# EAGLE board Uno (EAGLE 6.1)
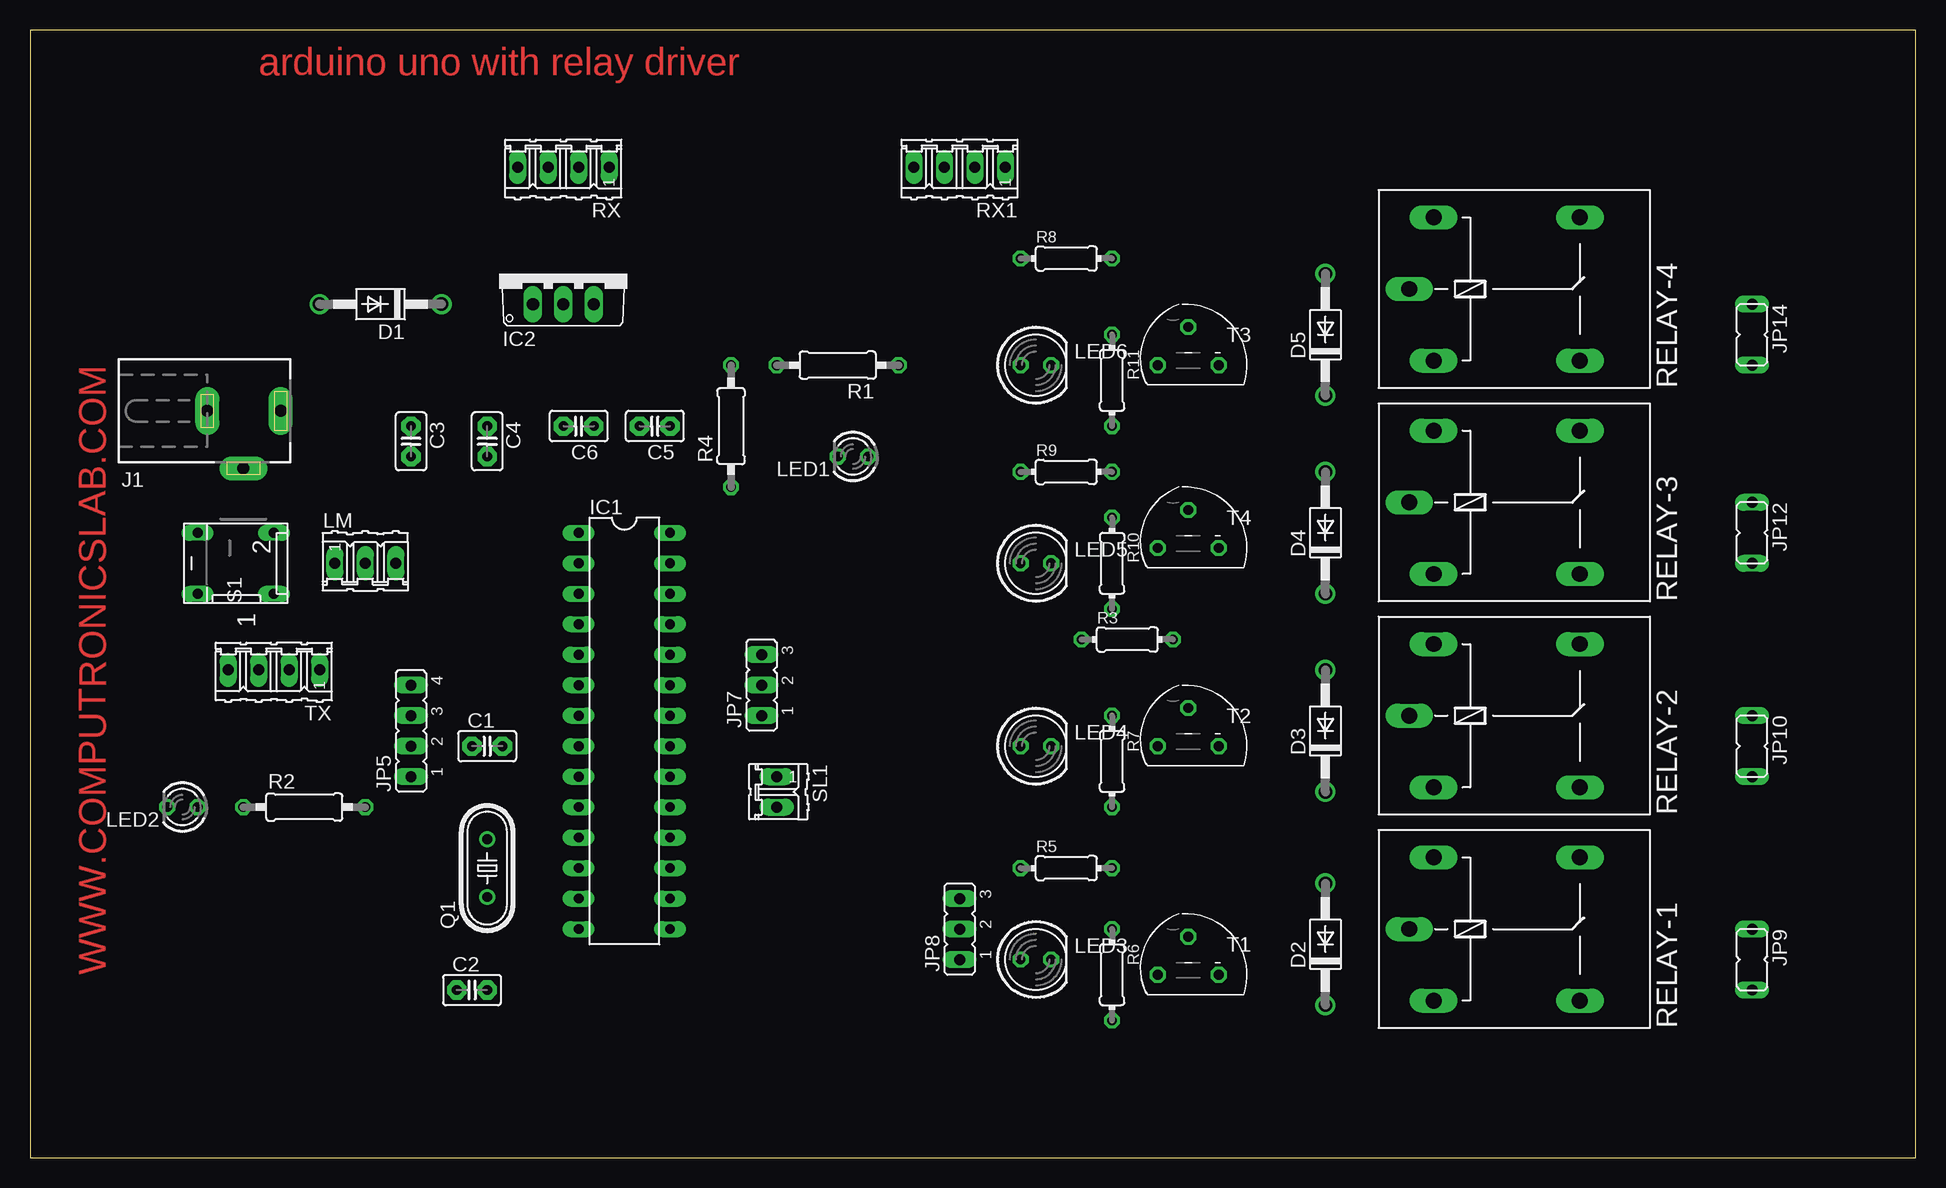
[diagram p0: board, top side]
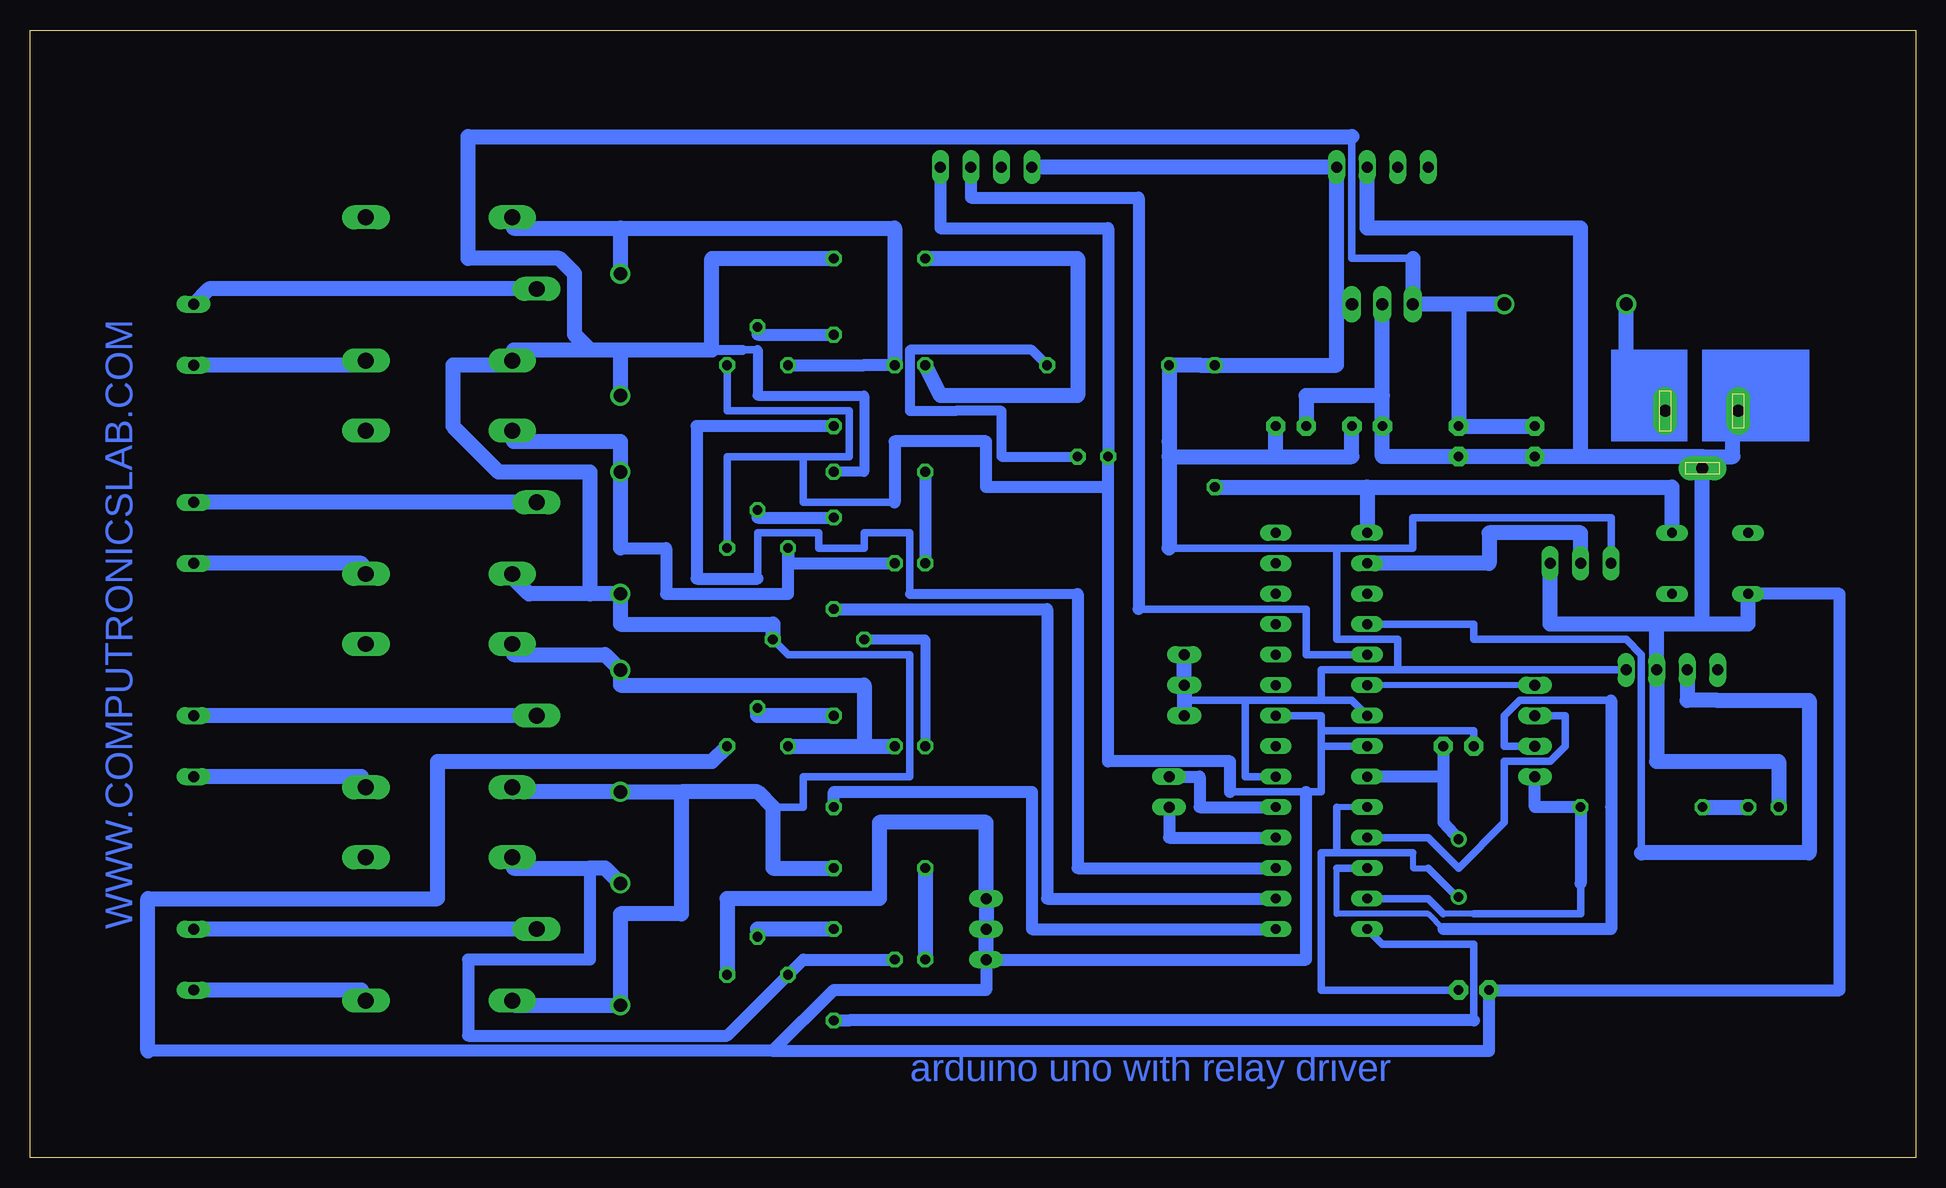
[diagram p1: board, bottom side, seen from below]

Size 157.15 x 93.97 mm. Coordinates in mm from the lower left corner, seen from the top.
Outline: 0,0 157.15,0 157.15,93.97 0,93.97 0,0
Copper layers (1*16): Top 0.035mm / dielectric 1.5mm / Bottom 0.035mm
Design rules: minimum track width 20mil, minimum drill 24mil, track to track 8mil, track to pad 8mil, pad to pad 8mil, via to via 8mil, smd to smd 8mil, copper to edge 40mil, drill to drill 8mil, minimum pad ring 10mil, minimum via ring 8mil, stop-mask expansion 4mil, vias tented up to drill 0mil, thermal gap 10mil

## Footprints (pad centres in the part's own frame; a part is rotated, then mirrored left to right if it is on the bottom)
C2.5-2 = drill 0.813 pad 1.6 octagon: 1 -1.27,0; 2 1.27,0
DO41-10 = drill 1.118: A 5.08,0; C -5.08,0
DIL28-3 = drill 0.813 long: 1 -16.51,-3.81; 2 -13.97,-3.81; 3 -11.43,-3.81; 4 -8.89,-3.81; 5 -6.35,-3.81; 6 -3.81,-3.81; 7 -1.27,-3.81; 8 1.27,-3.81; 9 3.81,-3.81; 10 6.35,-3.81; 11 8.89,-3.81; 12 11.43,-3.81; 13 13.97,-3.81; 14 16.51,-3.81; 15 16.51,3.81; 16 13.97,3.81; 17 11.43,3.81; 18 8.89,3.81; 19 6.35,3.81; 20 3.81,3.81; 21 1.27,3.81; 22 -1.27,3.81; 23 -3.81,3.81; 24 -6.35,3.81; 25 -8.89,3.81; 26 -11.43,3.81; 27 -13.97,3.81; 28 -16.51,3.81
TO220V = drill 1.016 long: 1 -2.54,-2.54; 2 0,-2.54; 3 2.54,-2.54
DCJ0303 = drill 1 pad 2 long: 1 0,3.1; 2 4.8,0; 3 0,-3
JP4 = drill 0.914 long: 1 -3.81,0; 2 -1.27,0; 3 1.27,0; 4 3.81,0
JP2 = drill 0.914 long: 1 -2.54,0; 2 0,0; 3 2.54,0
JP1 = drill 0.914 long: 1 0,-2.54; 2 0,2.54
LED3MM = drill 0.813 octagon: A -1.27,0; K 1.27,0
LED5MM = drill 0.813 octagon: A -1.27,0; K 1.27,0
03P = drill 0.914 long: 1 -2.54,0; 2 0,0; 3 2.54,0
HC49/S = drill 0.813: 1 -2.413,0; 2 2.413,0
0207/10 = drill 0.813 octagon: 1 -5.08,0; 2 5.08,0
0204/7 = drill 0.813 octagon: 1 -3.81,0; 2 3.81,0
G5LE = drill 1.321 long: 1 -7.493,-5.969; 2 -7.493,5.969; O 4.699,5.969; P -9.525,0; S 4.699,-5.969
04P = drill 0.914 long: 1 -3.81,0; 2 -1.27,0; 3 1.27,0; 4 3.81,0
DP-02 = drill 0.813 long: 1 -2.54,-2.54; 2 2.54,-2.54; 3 2.54,3.81; 4 -2.54,3.81
02P = drill 0.914 long: 1 -1.27,0; 2 1.27,0
TO92 = drill 0.813 octagon: 1 2.54,-1.27; 2 0,1.905; 3 -2.54,-1.27

## Placement (x,y rotation side)
C1  22pf  [C2.5-2]  38.1,34.29 0 top
C2  22pf  [C2.5-2]  36.83,13.97 0 top
C3  100UF  [C2.5-2]  31.75,59.69 270 top
C4  0.1uf  [C2.5-2]  38.1,59.69 270 top
C5  0.1uf  [C2.5-2]  52.07,60.96 180 top
C6  4.7uf  [C2.5-2]  45.72,60.96 180 top
D1  1N4007  [DO41-10]  29.21,71.12 180 top
D2  1N4007  [DO41-10]  107.95,17.78 90 top
D3  1N4007  [DO41-10]  107.95,35.56 90 top
D4  1N4007  [DO41-10]  107.95,52.07 90 top
D5  1N4007  [DO41-10]  107.95,68.58 90 top
IC1  ATMEGA328  [DIL28-3]  49.53,35.56 270 top
IC2  7805  [TO220V]  44.45,73.66 0 top
J1  [DCJ0303]  17.78,62.23 270 top
JP5  [JP4]  31.75,35.56 90 top
JP7  [JP2]  60.96,39.37 90 top
JP8  [JP2]  77.47,19.05 90 top
JP9  AC CONNECTOR  [JP1]  143.51,16.51 180 top
JP10  AC CONNECTOR  [JP1]  143.51,34.29 180 top
JP12  AC CONNECTOR  [JP1]  143.51,52.07 180 top
JP14  AC CONNECTOR  [JP1]  143.51,68.58 180 top
LED1  [LED3MM]  68.58,58.42 180 top
LED2  [LED3MM]  12.7,29.21 180 top
LED3  5MM  [LED5MM]  83.82,16.51 0 top
LED4  5MM  [LED5MM]  83.82,34.29 0 top
LED5  5MM  [LED5MM]  83.82,49.53 0 top
LED6  5MM  [LED5MM]  83.82,66.04 0 top
LM  35  [03P]  27.94,49.53 0 top
Q1  12MHZ  [HC49/S]  38.1,24.13 90 top
R1  220R  [0207/10]  67.31,66.04 180 top
R2  330R  [0207/10]  22.86,29.21 0 top
R3  1K  [0204/7]  91.44,43.18 0 top
R4  10K  [0207/10]  58.42,60.96 90 top
R5  1K  [0204/7]  86.36,24.13 0 top
R6  5.6K  [0204/7]  90.17,15.24 270 top
R7  5.6K  [0204/7]  90.17,33.02 270 top
R8  1K  [0204/7]  86.36,74.93 0 top
R9  1K  [0204/7]  86.36,57.15 0 top
R10  5.6K  [0204/7]  90.17,49.53 270 top
R11  5.6K  [0204/7]  90.17,64.77 270 top
RELAY-1  12V  [G5LE]  124.46,19.05 0 top
RELAY-2  12V  [G5LE]  124.46,36.83 0 top
RELAY-3  12V  [G5LE]  124.46,54.61 0 top
RELAY-4  12V  [G5LE]  124.46,72.39 0 top
RX  [04P]  44.45,82.55 180 top
RX1  [04P]  77.47,82.55 180 top
S1  [DP-02]  17.78,49.53 90 top
SL1  [02P]  62.23,30.48 270 top
T1  BC547  [TO92]  96.52,16.51 0 top
T2  BC547  [TO92]  96.52,35.56 0 top
T3  BC547  [TO92]  96.52,67.31 0 top
T4  BC547  [TO92]  96.52,52.07 0 top
TX  [04P]  20.32,40.64 180 top

## Library data of the parts
C1-C6 = capacitor-wima
D1-D5 = diode
IC1 = quantum-research-group; OC_FARNELL: unknown; OC_NEWARK: unknown
IC2 = linear
J1 = con-jack; OC_FARNELL: unknown; OC_NEWARK: unknown
JP5 JP7-JP10 JP12 JP14 = jumper
LED1-LED6 = led
LM RX RX1 SL1 TX = con-amp-quick; OC_FARNELL: unknown; OC_NEWARK: unknown
Q1 = crystal; OC_FARNELL: 1667008; OC_NEWARK: unknown
R1-R11 = rcl
RELAY-1-RELAY-4 = relay; OC_FARNELL: unknown; OC_NEWARK: unknown
S1 = switch-dil; MPN: MCDP02; OC_FARNELL: 1255233; OC_NEWARK: 26M1095
T1-T4 = transistor

## Nets
N$1: C1.2 IC1.9 Q1.2
N$2: C2.2 IC1.10 Q1.1
N$3: D1.A J1.1
N$4: C5.1 C6.1 IC1.7 IC1.20 IC2.3 JP7.1 JP7.2 JP7.3 LM.1 R1.2 R4.2 RX1.4 RX.1 TX.1
N$5: IC1.18 SL1.2
N$6: LED1.A R1.1
N$7: C3.1 C4.1 D1.C D2.C D3.C D4.C D5.C IC2.1 R3.2 R5.2 R8.2 R9.2 RELAY-1.1 RELAY-2.1 RELAY-3.1 RELAY-4.1
N$8: IC1.2 LM.2
N$9: IC1.5 RX1.2
N$11: IC1.4 TX.3
N$18: IC1.6 JP5.4
N$19: IC1.12 JP5.2
N$20: IC1.11 JP5.3
N$21: IC1.13 JP5.1 R2.2
N$27: IC1.19 SL1.1
N$28: D2.A LED3.K RELAY-1.2 T1.3
N$29: R7.1 T2.2
N$30: R6.1 T1.2
N$31: IC1.1 R4.1 S1.2
N$32: LED2.A R2.1
N$33: LED3.A R5.1
N$34: LED4.A R3.1
N$35: JP9.2 RELAY-1.S
N$36: JP9.1 RELAY-1.P
N$38: JP10.2 RELAY-2.S
N$39: JP10.1 RELAY-2.P
N$41: IC1.14 R6.2
N$42: D3.A LED4.K RELAY-2.2 T2.3
N$43: D4.A LED5.K RELAY-3.2 T4.3
N$45: R11.1 T3.2
N$46: R10.1 T4.2
N$47: LED5.A R9.1
N$48: LED6.A R8.1
N$49: JP12.2 RELAY-3.S
N$50: JP12.1 RELAY-3.P
N$51: JP14.2 RELAY-4.S
N$53: JP14.1 RELAY-4.P
N$55: C1.1 C2.1 C3.2 C4.2 C5.2 C6.2 IC1.8 IC1.22 IC2.2 J1.2 J1.3 JP8.1 JP8.2 JP8.3 LED1.K LED2.K LM.3 RX1.1 RX.2 S1.4 T1.1 T2.1 T3.1 T4.1 TX.2
N$56: IC1.16 R10.2
N$57: IC1.17 R11.2
N$58: D5.A LED6.K RELAY-4.2 T3.3
N$59: IC1.15 R7.2

## Tracks (layer width: path | path; a pad name or v marks a point on that pad's centre or on a via)
N$1
  Bottom 1.016: Q1.2 39.37,27.94 39.37,31.75 | 39.37,31.75 IC1.9 | C1.2 39.37,31.75
N$2
  Bottom 0.508: 41.91,25.4 41.91,24.13 40.64,24.13 | IC1.10 48.26,29.21 | 38.1,21.59 Q1.1
  Bottom 0.61: 40.64,24.13 38.1,21.59 | 48.26,25.4 41.91,25.4 | 48.26,29.21 48.26,25.4 | C2.2 49.53,13.97 49.53,25.4 48.26,25.4
N$3
  Bottom 1.27: D1.A 24.13,62.23 J1.1
N$4
  Bottom 0.508: 62.23,59.69 62.23,58.42
  Bottom 0.61: IC1.7 46.99,38.1 49.53,38.1 | 55.88,38.1 49.53,38.1 | 60.96,38.1 55.88,38.1 | 55.88,38.1 55.88,31.75 IC1.20 | 43.18,40.64 46.99,40.64 49.53,40.64 49.53,38.1 | 43.18,40.64 TX.1 | LM.1 25.4,53.34 41.91,53.34 41.91,50.8 48.26,50.8 | 62.23,50.8 48.26,50.8 | 43.18,40.64 43.18,43.18 48.26,43.18 48.26,50.8
  Bottom 1.27: JP7.1 60.96,38.1 JP7.2 JP7.3 | 48.26,71.12 RX.1 RX1.4 | IC2.3 48.26,71.12 | 62.23,50.8 62.23,59.69 R1.2 59.69,66.04 R4.2 48.26,66.04 48.26,71.12 | C6.1 46.99,58.42 53.34,58.42 | 62.23,58.42 53.34,58.42 | 53.34,58.42 C5.1
N$5
  Bottom 1.016: IC1.18 62.23,26.67 SL1.2
N$6
  Bottom 0.813: LED1.A 76.2,58.42 76.2,62.23 80.01,62.23 83.82,62.23 83.82,67.31 73.66,67.31 R1.1
N$7
  Bottom 0.508: 116.84,12.7 RELAY-1.1 | 116.84,30.48 RELAY-2.1 | 116.84,67.31 RELAY-4.1 | 107.95,67.31 110.49,67.31
  Bottom 0.61: 97.79,67.31 96.52,67.31 | 41.91,74.93 46.99,74.93 46.99,85.09 | 95.25,29.21 92.71,29.21 92.71,31.75 83.82,31.75 83.82,41.91 93.98,41.91 R3.2
  Bottom 0.813: R9.2 87.63,57.15 87.63,63.5 96.52,63.5 96.52,67.31 | 100.33,67.31 97.79,67.31
  Bottom 1.27: 116.84,12.7 D2.C 107.95,20.32 102.87,20.32 102.87,30.48 | R5.2 95.25,24.13 95.25,29.21 96.52,30.48 102.87,30.48 | 102.87,30.48 D3.C 116.84,30.48 | R3.2 95.25,44.45 107.95,44.45 D4.C 110.49,46.99 | 110.49,46.99 115.57,46.99 116.84,48.26 RELAY-3.1 | C3.1 C4.1 38.1,71.12 | D1.C 38.1,71.12 | 38.1,71.12 IC2.1 41.91,74.93 | 116.84,67.31 107.95,67.31 | 107.95,67.31 100.33,67.31 100.33,74.93 R8.2 | 107.95,67.31 D5.C | 46.99,85.09 120.65,85.09 120.65,74.93 113.03,74.93 111.76,73.66 111.76,68.58 110.49,67.31 | 110.49,46.99 110.49,57.15 118.11,57.15 121.92,60.96 121.92,66.04 118.11,66.04 RELAY-4.1
N$8
  Bottom 1.27: IC1.2 35.56,49.53 35.56,52.07 27.94,52.07 27.94,50.8 LM.2
N$9
  Bottom 0.61: IC1.5 50.8,41.91 50.8,45.72 64.77,45.72
  Bottom 1.016: 64.77,45.72 64.77,80.01 78.74,80.01 RX1.2
N$11
  Bottom 0.61: IC1.4 36.83,44.45 36.83,43.18 35.56,43.18 24.13,43.18 22.86,41.91 22.86,25.4
  Bottom 1.27: 22.86,25.4 8.89,25.4 8.89,38.1 16.51,38.1 19.05,38.1 TX.3
N$18
  Bottom 0.508: JP5.4 IC1.6
N$19
  Bottom 0.508: 48.26,24.13 48.26,20.32 40.64,20.32 39.37,19.05
  Bottom 0.61: 48.26,24.13 IC1.12 | 25.4,38.1 33.02,38.1 34.29,36.83 34.29,34.29 JP5.2
  Bottom 1.016: 25.4,38.1 25.4,29.21 25.4,19.05 39.37,19.05
N$20
  Bottom 0.61: IC1.11 40.64,26.67 38.1,24.13 34.29,27.94 34.29,33.02 30.48,33.02 29.21,34.29 29.21,36.83 JP5.3
N$21
  Bottom 0.508: 36.83,20.32 39.37,20.32
  Bottom 0.61: IC1.13 40.64,21.59 39.37,20.32 | 27.94,22.86 27.94,20.32 36.83,20.32
  Bottom 1.016: 27.94,22.86 R2.2 31.75,29.21 JP5.1
N$27
  Bottom 1.016: IC1.19 59.69,29.21 59.69,31.75 SL1.1
N$28
  Bottom 1.016: LED3.K 92.71,16.51 T1.3 99.06,10.16 120.65,10.16 120.65,16.51 110.49,16.51 110.49,24.13
  Bottom 1.27: RELAY-1.2 116.84,24.13 110.49,24.13 109.22,24.13 D2.A
N$29
  Bottom 1.27: R7.1 96.52,36.83 T2.2
N$30
  Bottom 0.508: 96.52,19.05 T1.2
  Bottom 1.27: R6.1 96.52,19.05
N$31
  Bottom 1.27: S1.2 20.32,55.88 45.72,55.88 | R4.1 45.72,55.88 | 45.72,55.88 IC1.1
N$32
  Bottom 1.27: R2.1 LED2.A
N$33
  Bottom 1.27: R5.1 LED3.A
N$34
  Bottom 0.813: LED4.A 82.55,43.18 R3.1
N$35
  Bottom 1.27: JP9.2 129.54,13.97 RELAY-1.S
N$36
  Bottom 1.27: RELAY-1.P JP9.1
N$38
  Bottom 1.27: JP10.2 129.54,31.75 RELAY-2.S
N$39
  Bottom 1.27: RELAY-2.P JP10.1
N$41
  Bottom 0.61: 36.83,11.43 36.83,17.78 44.45,17.78 IC1.14
  Bottom 1.016: 36.83,11.43 88.9,11.43 R6.2
N$42
  Bottom 1.27: T2.3 87.63,34.29 | 87.63,34.29 LED4.K | RELAY-2.2 116.84,41.91 109.22,41.91 D3.A 107.95,39.37 87.63,39.37 87.63,34.29
N$43
  Bottom 1.016: LED5.K 93.98,49.53 T4.3 93.98,46.99 104.14,46.99 104.14,50.8 107.95,50.8
  Bottom 1.27: RELAY-3.2 116.84,59.69 107.95,59.69 D4.A 107.95,50.8
N$45
  Bottom 1.016: R11.1 96.52,68.58 T3.2
N$46
  Bottom 1.016: R10.1 96.52,53.34 T4.2
N$47
  Bottom 1.016: R9.1 LED5.A
N$48
  Bottom 1.27: LED6.A 81.28,63.5 69.85,63.5 69.85,74.93 R8.1
N$49
  Bottom 1.27: JP12.2 129.54,49.53 RELAY-3.S
N$50
  Bottom 1.27: RELAY-3.P JP12.1
N$51
  Bottom 1.27: JP14.2 129.54,66.04 RELAY-4.S
N$53
  Bottom 1.27: JP14.1 142.24,72.39 RELAY-4.P
N$55
  Bottom 0.508: 15.24,62.23 J1.3
  Bottom 0.61: T4.1 99.06,58.42 92.71,58.42 | 92.71,58.42 88.9,58.42 88.9,62.23 92.71,62.23 99.06,62.23 T3.1 | 92.71,58.42 92.71,54.61 85.09,54.61 | 49.53,35.56 49.53,36.83 IC1.22 | 49.53,35.56 49.53,34.29 | C1.1 36.83,35.56 49.53,35.56 | 49.53,34.29 49.53,30.48 50.8,30.48 57.15,30.48 | 49.53,34.29 IC1.8
  Bottom 1.016: RX1.1 81.28,77.47 67.31,77.47 LED1.K 67.31,55.88 | 85.09,54.61 85.09,59.69 77.47,59.69 77.47,55.88 67.31,55.88 | 95.25,8.89 147.32,8.89 | 95.25,8.89 90.17,13.97 77.47,13.97 JP8.1 50.8,16.51 50.8,30.48 | 95.25,8.89 35.56,8.89 C2.1 6.35,13.97 6.35,46.99 S1.4 | 67.31,55.88 67.31,33.02 57.15,33.02 57.15,30.48
  Bottom 1.27: 44.45,63.5 C6.2 44.45,58.42 C4.2 C3.2 27.94,58.42 | 44.45,63.5 IC2.2 | C5.2 50.8,63.5 44.45,63.5 | RX.2 45.72,77.47 27.94,77.47 27.94,58.42 | 15.24,62.23 15.24,58.42 17.78,58.42 | LED2.K 11.43,33.02 21.59,33.02 TX.2 21.59,44.45 | S1.4 13.97,44.45 17.78,44.45 | LM.3 30.48,44.45 21.59,44.45 | 17.78,44.45 21.59,44.45 | 17.78,44.45 J1.2 17.78,58.42 | 17.78,58.42 27.94,58.42 | T1.1 99.06,21.59 86.36,21.59 86.36,27.94 77.47,27.94 JP8.3 JP8.2 JP8.1 | T2.1 100.33,33.02 123.19,33.02 123.19,21.59 147.32,21.59 147.32,8.89
N$56
  Bottom 1.016: IC1.16 72.39,21.59 72.39,45.72 R10.2
N$57
  Bottom 0.61: 83.82,46.99 83.82,52.07 87.63,52.07 87.63,50.8 91.44,50.8 91.44,52.07 96.52,52.07 96.52,48.26
  Bottom 0.813: 83.82,46.99 69.85,46.99
  Bottom 1.016: IC1.17 69.85,24.13 69.85,46.99 | 96.52,48.26 101.6,48.26 101.6,60.96 R11.2
N$58
  Bottom 1.016: T3.3 87.63,66.04 LED6.K
  Bottom 1.27: 107.95,77.47 D5.A | 107.95,77.47 116.84,77.47 RELAY-4.2 | LED6.K 85.09,77.47 107.95,77.47
N$59
  Bottom 1.016: IC1.15 73.66,19.05 73.66,30.48 90.17,30.48 R7.2
(copper drawn outside any net)
  shapes: Bottom area x3

## Text on the board
Top: arduino uno with relay driver | WWW.COMPUTRONICSLAB.COM
Bottom: WWW.COMPUTRONICSLAB.COM | arduino uno with relay driver